# Altium PCB PDC_Rev_2.PcbDoc (part 2 of 3)
Units mil, origin at the board's own origin, x right, y up, seen from the top; angles counter-clockwise.
Board outline 5005 x 4200 mil, 4 copper layers (Top Layer, Signal_1, Signal_2, Bottom Layer), stack 23.756 mil thick; 184 components, 175 nets, 851 pads, 1149 vias.
Unrouted connection lines stored in the file: 187.
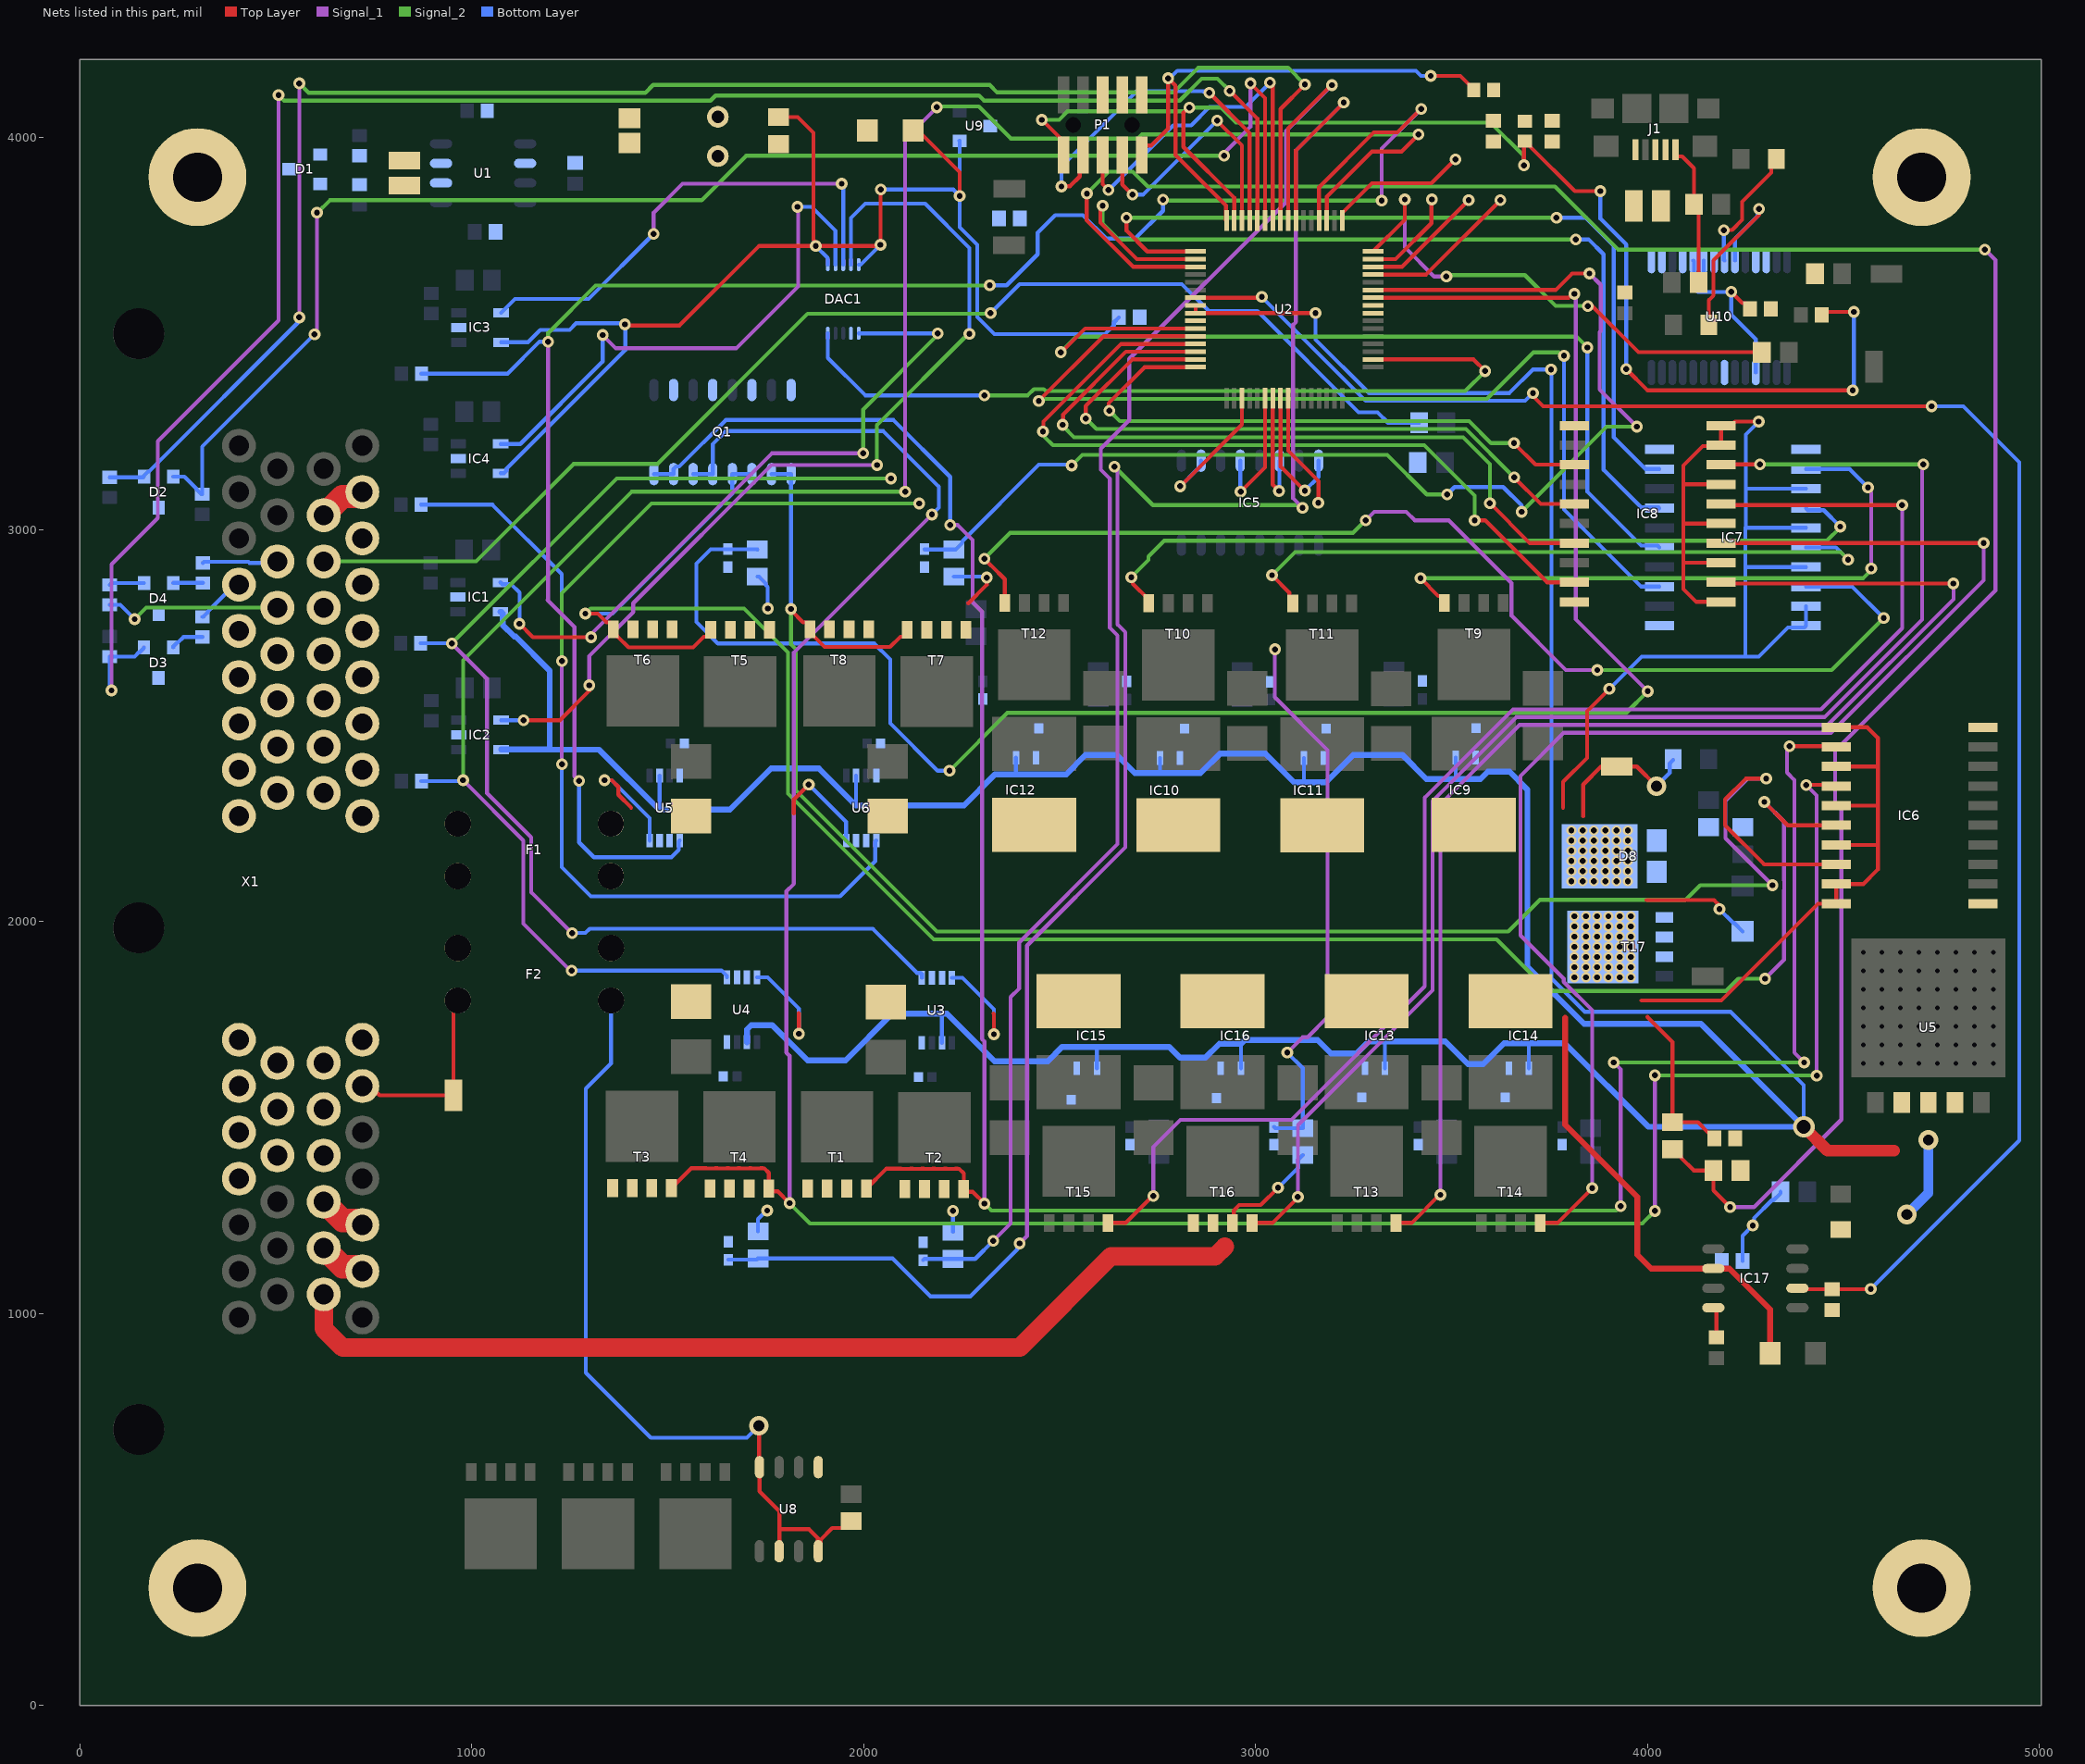
[diagram p4: the nets of this part, all layers, seen from the top]

## Part data
C1: library part 943, Dielectric=Ceramic, Manufacturer_id=1, Package="CAP 0603/1608", Voltage_Rating=50V, Created_By="Nick Mah", Created_Date=10/20/2018, Drawer_id=1, idCapacitor=943, Name="Cap_0.10uf_50V_CAP 0603/1608"
C2: library part 929, Dielectric=Ceramic, Manufacturer_id=1, Package="CAP 0603/1608", Voltage_Rating=50V, Created_By="Nick Mah", Created_Date=10/20/2018, Drawer_id=1, idCapacitor=929, Name="Cap_4700pf_50V_CAP 0603/1608"
C3: library part 223, Dielectric=Ceramic, Manufacturer_id=1, Package="CAP 0603/1608", Voltage_Rating=16V, Created_By="Nick Mah", Created_Date=10/20/2018, Drawer_id=1, idCapacitor=223, Name="Cap_0.10uf_16V_CAP 0603/1608"
C4 C6 C24 C25 C26: library part 583, Dielectric=Ceramic, Manufacturer_id=1, Package="CAP 0603/1608", Voltage_Rating=25V, Created_By="Nick Mah", Created_Date=10/20/2018, Drawer_id=1, idCapacitor=583, Name="Cap_0.10uf_25V_CAP 0603/1608"
C5: library part 529, Dielectric=Ceramic, Manufacturer_id=1, Package="CAP 0603/1608", Voltage_Rating=25V, Created_By="Nick Mah", Created_Date=10/20/2018, Drawer_id=1, idCapacitor=529, Name="Cap_100pf_25V_CAP 0603/1608"
C7 C8 C9 C10 C11 C12 C13 C14 C15 C16 C17 C18: library part 57, Dielectric=Ceramic, Manufacturer_id=1, Package="CAP 0402/1005", Voltage_Rating=16V, Created_By="Nick Mah", Created_Date=10/20/2018, Drawer_id=1, idCapacitor=57, Name="Cap_220pf_16V_CAP 0402/1005"
C19 C20: library part 235, Dielectric=Ceramic, Manufacturer_id=1, Package="CAP 0603/1608", Voltage_Rating=16V, Created_By="Nick Mah", Created_Date=10/20/2018, Drawer_id=1, idCapacitor=235, Name="Cap_10uf_16V_CAP 0603/1608"
C21 C22: library part 231, Dielectric=Ceramic, Manufacturer_id=1, Package="CAP 0603/1608", Voltage_Rating=16V, Created_By="Nick Mah", Created_Date=10/20/2018, Drawer_id=1, idCapacitor=231, Name="Cap_2.2uf_16V_CAP 0603/1608"
C23: library part 689, Dielectric=Ceramic, Manufacturer_id=1, Package="CAP 0805/2012", Voltage_Rating=25V, Created_By="Nick Mah", Created_Date=10/20/2018, Drawer_id=1, idCapacitor=689, Name="Cap_4700pf_25V_CAP 0805/2012"
D1: library part 7, "ESD Protection Diode", Manufacturer_id=1, Package=SOT-23, Power=350W, Supplier1PartNo=NUP1105LT1GOSCT-ND, ComponentLink1URL=https://www.digikey.com/product-detail/en/on-semiconductor/NUP1105LT1G/NUP1105LT1GOSCT-ND/2122067, Drawer_id=1, Ic=8A, idDiode=7, Link=https://www.digikey.com/product-detail/en/on-semiconductor/NUP1105LT1G/NUP1105LT1GOSCT-ND/2122067, MfrPartNo=NUP1105LT1G, Name=SOT-23_350W_Zener, Num_Circuits=1, Supplier1=Digikey, Type=Zener
D2 D3 D4: library part 14, "DIODE ZENER ARRAY 4.7V SOT23-3", Manufacturer_id=1, MfrPartNo=AZ23C4V7-7-F, Package=SOT23-3, Power=300mW, Created_By="Angel Delgado", Drawer_id=1, idDiode=14, Link=https://www.digikey.com/product-detail/en/diodes-incorporated/AZ23C4V7-7-F/AZ23C4V7-FDICT-ND/815309, Name=AZ23C4V7-7-F, Num_Circuits=2, Supplier1=Digi-Key, Type="Zener Array"
D5: library part 2, "Diode Super Barrier 40V 1A Surface Mount SOD-123F", Manufacturer_id=1, MfrPartNo=1N5819HW1-7-F, Package=SOD-123, Power=40V, Supplier1PartNo=1N5819HW1-7-FDITR-ND, ComponentLink1Description=Datasheet, ComponentLink1URL=https://www.diodes.com/assets/Datasheets/1N5819HW1.pdf, Drawer_id=1, Ic=1A, idDiode=2, Link=https://www.digikey.com/product-detail/en/diodes-incorporated/1N5819HW1-7-F/1N5819HW1-7-FDITR-ND/5768523, Name=1N5819, Num_Circuits=1, Supplier1=Digi-Key, Type="Super Barrier"
D6: library part 4, "100V Reverse DC Voltage", Manufacturer_id=1, MfrPartNo=1N4148W-7-F, Package=SOD123, Drawer_id=1, Ic="300 mA", idDiode=4, Link=https://www.digikey.com/product-detail/en/diodes-incorporated/1N4148W-7-F/1N4148W-FDICT-ND/815280, Name=1N4148W-7-F
D7: library part 10, "Zener Diode 14V 500mW ±5% Surface Mount SOD-123", Manufacturer_id=8, Package=SOD-123, Power=500mW, Supplier1PartNo=DDZ9701-7DICT-ND, ComponentLink1Description=Datasheet, ComponentLink1URL=https://www.diodes.com/assets/Datasheets/ds30410.pdf, Drawer_id=1, idDiode=10, Link=https://www.digikey.com/product-detail/en/diodes-incorporated/DDZ9701-7/DDZ9701-7DICT-ND/3877402, MfrPartNo=DDZ9701-7, Name=DDZ9701, Num_Circuits=1, Supplier1=Digi-Key, Type=Zener
D8: library part 11, Manufacturer_id=1, MfrPartNo=FSV20100V, Package=TO-277, Supplier1PartNo=FSV20100VCT-ND, ComponentLink1Description=Datasheet, ComponentLink1URL=https://www.fairchildsemi.com/datasheets/FS/FSV20100V.pdf, Drawer_id=1, idDiode=11, Link=https://www.digikey.com/product-detail/en/on-semiconductor/FSV20100V/FSV20100VCT-ND/5306682, Name=FSV20100V, Type=Schottky
D9 LED2: library part 2, Manufacturer_id=1, Package=0805, Brightness=7mcd, Drawer_id=1, Id=20mA, idLED=2, Link=https://www.digikey.com/product-detail/en/visual-communications-company-vcc/CMD17-21VGD-TR8/L62505CT-ND/254936, Name=CMD17_0805_GREEN, Vf=2.1V
D10: library part 1, Package=0805, Drawer_id=1, idLED=1, Manufacturer_id=1, Name=LED_0805_RED, Vf=0.7V
DAC1: library part 25, "10bit 4 channel DAC", Manufacturer_id=1, MfrPartNo=AD5314ARMZ, Package=MSOP-10, Drawer_id=1, idFuse=3, idIC_Misc=25, Link=https://www.digikey.com/product-detail/en/analog-devices-inc/AD5314ARMZ/AD5314ARMZ-ND/653841, Name=AD5314ARMZ, Num_Circuits=4, Type=DAC, Vin(Max)=5.5, Vin(Min)=2.5
F1 F2 U10: library part 3, Manufacturer_id=1, Drawer_id=1
  F1 F2: idFuse=3, Name="3568 Mini Fuse Holder"
  U10: Created_By=Kyle, idIC_Interface=3, Link=https://www.digikey.com/product-detail/en/ftdi-future-technology-devices-international-ltd/FT232RL-REEL/768-1007-1-ND/1836402, MfrPartNo=FT232RL, Name="USB FTDI", Protocol=UART, Vin(Max)=5.25, Vin(Min)=3.3
IC1 IC2 IC3 IC4: library part 4, Manufacturer_id=1, MfrPartNo=LT1716IS5#PBF, Drawer_id=1, idOp_Amp=4, Name="Op-Amp LT1716", Num_Circuits=1
IC5: library part 20, idIC_Misc=20
IC6 IC7 IC8: library part 16, Manufacturer_id=1, Created_By="Eunice Bernardo", Created_Date=10/27/2018, Drawer_id=1, idIC_Misc=16, Name="LT1161ISWPBF MOSFET Driver"
IC9 IC10 IC11 IC12 IC13 IC14 IC15 IC16 U3 U4 U5 U6: library part 13, Manufacturer_id=1, Package=MS8, Created_By=Eddy, Created_Date=10/17/2018, Drawer_id=1, idIC_Misc=13, Name="LT6100 Current Sense Amp"
IC17: library part 10, "IC VREF SERIES 5V 8SOIC", Manufacturer_id=1, MfrPartNo=MAX6350CSA+, Package=SOIC-8, Created_By="Albert Panuco", Drawer_id=1, idPMIC_Lin=10, Link=https://www.digikey.com/product-detail/en/maxim-integrated/MAX6350CSA/MAX6350CSA-ND/1867176, Name=MAX6350CSA+_5V_Ref, Num_Outputs=1, Output_Config=5V, Updated_By="Albert Panuco", Vin(Max)=40V, Vout(Max)=12V
J1: library part 5, "USB Micro Type B", Manufacturer_id=1, ComponentLink1Description=Datasheet, Created_By=Aiku, Created_Date=10/20/2018, Drawer_id=1, idConn=5, Link=https://www.mouser.com/ProductDetail/TE-Connectivity-AMP/1981568-1?qs=sGAEpiMZZMulM8LPOQ%252bykzEIUPbUCiSfqsfxH3Oq%252bYo%3d, MfrPartNo=1981568-1, Name="TE USB Micro", Num_Contacts=5, Supplier1=TE
LED1: library part 2, Manufacturer_id=1, Brightness=35mcd, Drawer_id=1, Id=20mA, idLED=2, Name=LED_0805_GREEN, Vf=2V
M1 M2 M3 T1 T2 T3 T4 T5 T6 T7 T8 T9 T10 T11 T12 T13 T14 T15 T16 T17: library part 3, "N-Channel 25V 100A (Tc) 106W (Tc) Surface Mount LFPAK56, Power-SO8", Manufacturer_id=6, MfrPartNo=PSMN2R2-25YLC,115, Package=LFPAK-SO8, Supplier1PartNo=1727-5299-1-ND, ComponentLink1Description=Datasheet, ComponentLink1URL=https://assets.nexperia.com/documents/data-sheet/PSMN2R2-25YLC.pdf, Created_By=Nick, Drawer_id=1, Id=100A, idFETs=3, Link=https://www.digikey.com/product-detail/en/nexperia-usa-inc/PSMN2R2-25YLC115/1727-5299-1-ND/2674299, Name=PSMN2R2, Num_Circuits=1, Rds_On=2.5mOhm, Supplier1=Digi-Key, Vdss=25V, Vgs(Max)=20V, Vgs(typ)=10V
OVP_G PWR_IN PWR_OUT TEST_CANN1 TEST_CANP1 TEST_CANRX1 TEST_CANTX1 TEST_USBD_N1 TEST_USBD_P1 UART_RX1 UART_TX1: library part 5, Manufacturer_id=1, Package=0603, ComponentLink1Description=Datasheet, ComponentLink1URL=https://www.te.com/commerce/DocumentDelivery/DDEController?Action=srchrtrv&DocNm=1773266&DocType=DS&DocLang=English, Drawer_id=1, idTable=5, Link=https://www.digikey.com/product-detail/en/te-connectivity-amp-connectors/RCU-0C/A106145CT-ND/3477802, MfrPartNo=RCU-0C, Name=RCU-0C_Test_Point
P1: library part 4, "2 row connector", Manufacturer_id=1, Voltage_Rating=None, ComponentLink1Description=Datasheet, Created_By=Aiku, Drawer_id=1, idConn=4, Link=https://www.digikey.com/product-detail/en/5103309-1/A33160-ND/1114898?utm_campaign=buynow&WT.z_cid=ref_octopart_dkc_buynow&utm_medium=aggregator&curr=usd&site=us&utm_source=octopart, MfrPartNo=5103309-1, Name=CONN_TE_2X5POS, Num_Contacts=10, Num_Rows=2, Pitch=2.54mm
"PTC Fuse1" "PTC Fuse2" "PTC Fuse3" "PTC Fuse4" "PTC Fuse5" "PTC Fuse6" "PTC Fuse7" "PTC Fuse8": library part 6, "Fuse", Manufacturer_id=1, MfrPartNo=2920L500/16MR, Created_By=Angel, Drawer_id=1, I_hold="5 A", I_max="40 A", I_trip="10 A", idFuse=6, LatestRevisionDate=17-Jul-2002, LatestRevisionNote="Re-released for DXP Platform.", Link=https://www.digikey.com/product-detail/en/littelfuse-inc/2920L500-16MR/F6136CT-ND/4147146, Name=2920L500/16MR, PackageDescription="Thru-Hole; 2 Leads", PackageReference=PIN-W2/E2.8, Published=8-Jun-2000, Publisher="Altium Limited", V_max="16 V"
Q1: library part 5, Manufacturer_id=1, Package=SOIC-16, Created_By="Angel Delgado", Drawer_id=1, hFE=75, Ic=200mA, idBJT=5, Link=https://www.mouser.com/ProductDetail/ON-Semiconductor-Fairchild/MMPQ3904?qs=sGAEpiMZZMshyDBzk1%2fWi8oN7VHZ91OkACYhS8H8agM%3d, MfrPartNo=MMPQ3904, Name=MMPQ3904, Num_Circuits=4, Type="NPN Array", Vce(Max)=40V
R1 R4 R7 R10 R23: library part 313, Manufacturer_id=1, Package=0603, Power=1/10W, Tolerance=1%, ComponentLink1Description=Datasheet, Created_By="Nick Mah", Created_Date=2018-10-20, Drawer_id=1, idResistor=313, Name=Res_10k_0603_1/10W_1%, Supplier 1=Digi-Key
R2 R5 R8 R11 R16: library part 529, Manufacturer_id=1, Package=0805, Power=1/10W, Tolerance=1%, ComponentLink1Description=Datasheet, Created_By="Nick Mah", Created_Date=2018-10-20, Drawer_id=1, idResistor=529, Name=Res_10k_0805_1/10W_1%, Supplier 1=Digi-Key
R3 R6 R9 R12: library part 300, Manufacturer_id=1, Package=0603, Power=1/10W, Tolerance=1%, ComponentLink1Description=Datasheet, Created_By="Nick Mah", Created_Date=2018-10-20, Drawer_id=1, idResistor=300, Name=Res_3.0k_0603_1/10W_1%, Supplier 1=Digi-Key
R13 R14: library part 1340, Manufacturer_id=1, Package=0603, Power=1/10W, Tolerance=5%, ComponentLink1Description=Datasheet, Created_By="Nick Mah", Created_Date=2018-10-20, Drawer_id=1, idResistor=1340, Name=Res_62_0603_1/10W_5%, Supplier 1=Digi-Key
R15: library part 2293, Manufacturer_id=1, Package=0603, Power=1/10W, Tolerance=10%, ComponentLink1Description=Datasheet, Created_By="Nick Mah", Created_Date=2018-10-20, Drawer_id=1, idResistor=2293, Name=Res_100_0603_1/10W_10%, Supplier 1=Digi-Key
R17 R18 R19 R20 R21 R22: library part 297, Manufacturer_id=1, Package=0603, Power=1/10W, Tolerance=1%, ComponentLink1Description=Datasheet, Created_By="Nick Mah", Created_Date=2018-10-20, Drawer_id=1, idResistor=297, Name=Res_2.2k_0603_1/10W_1%, Supplier 1=Digi-Key
R24: library part 1393, Manufacturer_id=1, Package=0603, Power=1/10W, Tolerance=5%, ComponentLink1Description=Datasheet, Created_By="Nick Mah", Created_Date=2018-10-20, Drawer_id=1, idResistor=1393, Name=Res_10k_0603_1/10W_5%, Supplier 1=Digi-Key
R25 R28 R31 R34: library part 2702, "Current Sense Resistor", Manufacturer_id=1, MfrPartNo=CSNL2010FT2L00, Package=2010, Power=1.5W, Supplier Part Number 1=Digi-Key, Tolerance=1%, ComponentLink1Description=Datasheet, Created_By=Angel, Drawer_id=1, idResistor=2702, Link=https://www.digikey.com/product-detail/en/stackpole-electronics-inc/CSNL2010FT2L00/CSNL2010FT2L00CT-ND/1788126, Name=Res_.002_2010_1.5W_1%, Supplier 1=Digi-Key
R26 R29 R32 R35 R38 R41 R44 R47 R50 R53 R56 R59: library part 2430, Manufacturer_id=1, Package=0805, Power=1/10W, Tolerance=10%, ComponentLink1Description=Datasheet, Created_By="Nick Mah", Created_Date=2018-10-20, Drawer_id=1, idResistor=2430, Name=Res_27k_0805_1/10W_10%, Supplier 1=Digi-Key
R27 R30 R33 R36 R39 R42 R45 R48 R51 R54 R57 R60: library part 97, Manufacturer_id=1, Package=0402, Power=1/10W, Tolerance=1%, ComponentLink1Description=Datasheet, Created_By="Nick Mah", Created_Date=2018-10-20, Drawer_id=1, idResistor=97, Name=Res_10k_0402_1/10W_1%, Supplier 1=Digi-Key
R37 R40 R43 R46 R49 R52 R55 R58: library part 2701, "Current Sense Resistor", Manufacturer_id=1, MfrPartNo=CSRN2010FK20L0, Package=2010, Power=1W, Supplier Part Number 1=Digi-Key, Tolerance=1%, ComponentLink1Description=Datasheet, Created_By=Angel, Drawer_id=1, idResistor=2701, Link=https://www.digikey.com/product-detail/en/stackpole-electronics-inc/CSRN2010FK20L0/CSRN2010FK20L0TR-ND/1646098, Name=Res_.02_2010_1W_1%, Supplier 1=Digi-Key
R61: library part 2432, Manufacturer_id=1, Package=0805, Power=1/10W, Tolerance=10%, ComponentLink1Description=Datasheet, Created_By="Nick Mah", Created_Date=2018-10-20, Drawer_id=1, idResistor=2432, Name=Res_39k_0805_1/10W_10%, Supplier 1=Digi-Key
R62: library part 2533, Manufacturer_id=1, Package=0805, Power=1/4W, Tolerance=10%, ComponentLink1Description=Datasheet, Created_By="Nick Mah", Created_Date=2018-10-20, Drawer_id=1, idResistor=2533, Name=Res_10k_0805_1/4W_10%, Supplier 1=Digi-Key
R63: library part 2413, Manufacturer_id=1, Package=0805, Power=1/10W, Tolerance=10%, ComponentLink1Description=Datasheet, Created_By="Nick Mah", Created_Date=2018-10-20, Drawer_id=1, idResistor=2413, Name=Res_1.0k_0805_1/10W_10%, Supplier 1=Digi-Key
R64: library part 2703, Manufacturer_id=1, Package=0805, Power=1/10W, Supplier Part Number 1=Digi-Key, Tolerance=0.5%, ComponentLink1Description=Datasheet, Drawer_id=1, idResistor=2703, Link=https://www.digikey.com/product-detail/en/susumu/RR1220P-1472-D-M/RR12P14.7KDCT-ND/1288245, Name=Res_14.7K_0805_1/10W_0.5%
R65: library part 553, Manufacturer_id=1, Package=0805, Power=1/10W, Tolerance=1%, ComponentLink1Description=Datasheet, Created_By="Nick Mah", Created_Date=2018-10-20, Drawer_id=1, idResistor=553, Name=Res_100k_0805_1/10W_1%, Supplier 1=Digi-Key
R66: library part 545, Manufacturer_id=1, Package=0805, Power=1/10W, Tolerance=1%, ComponentLink1Description=Datasheet, Created_By="Nick Mah", Created_Date=2018-10-20, Drawer_id=1, idResistor=545, Name=Res_47k_0805_1/10W_1%, Supplier 1=Digi-Key
R67: library part 497, Manufacturer_id=1, Package=0805, Power=1/10W, Tolerance=1%, ComponentLink1Description=Datasheet, Created_By="Nick Mah", Created_Date=2018-10-20, Drawer_id=1, idResistor=497, Name=Res_470_0805_1/10W_1%, Supplier 1=Digi-Key
R68 R69 R70 R71: library part 721, Manufacturer_id=1, Package=0805, Power=1/4W, Tolerance=1%, ComponentLink1Description=Datasheet, Created_By="Nick Mah", Created_Date=2018-10-20, Drawer_id=1, idResistor=721, Name=Res_1.0k_0805_1/4W_1%, Supplier 1=Digi-Key
R?: library part 985, Manufacturer_id=1, Package=0805, Power=1/2W, Tolerance=1%, ComponentLink1Description=Datasheet, Created_By="Nick Mah", Created_Date=2018-10-20, Drawer_id=1, idResistor=985, Name=Res_100k_0805_1/2W_1%, Supplier 1=Digi-Key
U1: library part 5, Manufacturer_id=1, MfrPartNo=MCP2561, Package=SOIC-8, Created_By="Angel Delgado", Data_Rate=1Mbps, Drawer_id=1, idIC_Interface=5, Link=https://www.digikey.com/product-detail/en/microchip-technology/MCP2561T-E-SN/MCP2561T-E-SNCT-ND/5148846, Name="CAN Transceiver", Num_Circuits=1, Protocol=CAN, Type=Transceiver, Vin(Max)=5.5V, Vin(Min)=4.5V
U2: library part 1, Drawer_id=1, idMCU=1, Manufacturer_id=1, Name="MKE18F512VLH16 MCU"
U5: library part 6, Current_Rating=2A, Dropout_Voltage=0.7V, Manufacturer_id=1, MfrPartNo=BA50DD0WHFP-TR, Drawer_id=1, idPMIC_Lin=6, Link=https://www.mouser.com/ProductDetail/ROHM-Semiconductor/BA50DD0WHFP-TR?qs=4kLU8WoGk0sFpKnESpdNFg%3D%3D, Name="BA50DD0WHFP-TR Linear Voltage Regulator 5", Vin(Max)=33V, Vin(Min)=3V, Vout(Max)=5V
U8: library part 18, "Protected High Side MOSFET Driver", Manufacturer_id=1, Drawer_id=1, idIC_Misc=18, Name="LT1910 MOSFET Driver"
U9: library part 23, Manufacturer_id=1, MfrPartNo=MCP9701T-E/TT, Package=SOT23-3, Drawer_id=1, idFuse=3, idIC_Misc=23, Link=https://www.digikey.com/product-detail/en/microchip-technology/MCP9701T-E-TT/MCP9701T-E-TTCT-ND/1987446, Name=MCP970x, Vin(Max)=5.5V, Vin(Min)=3.1V
W1: library part 18, "Jumper headers", Manufacturer_id=1, MfrPartNo=XG8T-0231, ComponentLink1Description=Datasheet, Drawer_id=1, idConn=18, idFuse=3, Link=https://www.digikey.ca/product-detail/en/omron-electronics-inc-emc-div/XG8T-0231/XG8T-0231-ND/1829453, Name=XG8T-0231, Num_Contacts=2, Num_Rows=1, Pitch=".1 mm", Supplier1=Digi-Key
X1: library part 3, "90 Degree", Manufacturer_id=1, ComponentLink1Description=Datasheet, Drawer_id=1, idConn=3, Link=https://www.te.com/usa-en/product-3-6437285-2.html, MfrPartNo=3-6437285-2, Name="AMP Superseal 60POS 90Deg", Num_Contacts=60, Num_Rows=4, Pitch="3 mm"

## Free pads (board coordinates)
  round 250 hole 125: 1(300,300) 1(300,3900) 1(4700,300) 1(4700,3900)

## Via types
v1: diameter 25, hole 15, Top Layer to Bottom Layer, 876 vias
v2: diameter 30, hole 15, Top Layer to Bottom Layer, 268 vias
v3: diameter 50, hole 28, Top Layer to Bottom Layer, 4 vias
v4: diameter 55, hole 35, Top Layer to Bottom Layer, 1 vias

## Nets (pads, with @x,y where several pads share a name; then routed paths per layer and width w, separated by ;. In a path a pad name is that pad's centre, name@x,y a point inside that pad or via, vN(x,y) a via of type N, cw(c..) or ccw(c..) an arc to the next point about the centre after c; other vN are vias at no path point)
5VREF: C6.2 C22.2 IC17.6 U2.7 | length 4753.4
  Top Layer w10: U2.7@2847.24,3592.17 3014.17,3592.17 v2(3016,3594) ; v2(3708,3349) 3708,3341 3734,3315 v2(4725,3315) ; IC17.6@4382.73,1064.91 4403.15,1064.91 4406.02,1062.03 C22.2@4471,1062.03 4569.03,1062.03 v2(4570,1063)
  Bottom Layer w10: v2(3016,3594) 3281,3329 3688,3329 v2(3708,3349) ; v2(4570,1063) 4949,1442 4949,3172 4806,3315 v2(4725,3315)
12V_IN: F1.2 F2.2 PWR_IN.1 X1.A8 X1.A9 X1.A17 X1.B1 X1.B2 X1.B8 X1.B9 | length 489
  Top Layer w10: X1.B2@720.87,1580.71 741.32,1580.71 765.03,1557 PWR_IN.1@953.1,1557 953.1,1772.14 964.72,1783.76 F2.2@964.72,1799.16
+5: C4.2 C19.2 D6.2 DAC1.1 DAC1.5 IC1.5 IC2.5 IC3.5 IC4.5 IC9.2 IC10.2 IC11.2 IC12.2 IC13.2 IC14.2 IC15.2 IC16.2 R16.2 R63.1 R65.2 U2.8 U2.9 U3.2 U4.2 U5.2 U5.4@4784.61,1538.86 U6.2 U9.1 | length 16005.7
  Top Layer w10: v2(1390.8,3524) 1393.8,3521 1530,3521 1733,3724 v2(1878,3724) ; R65.2@1783,4052.9 1832.1,4052.9 1872,4013 1872,3739.86 1874.17,3737.68 1874.17,3727.83 v2(1878,3724) ; v2(2044,3868) 2043,3867 v2(2043,3727) 2040,3724 v2(1878,3724) ; D6.2@2126.07,4018.45 2132.62,4025 2245,3912.62 v2(2245,3852) ; U2.8@2847.24,3572.48 U2.9@2847.24,3552.8 v2(3153,3552.8)
  Top Layer w30: v4(4399,1476.64) 4459.64,1416 4629.5,1416
  Bottom Layer w10: IC4.5@1074,3144.2 1081.87,3144.2 1088.69,3151.01 1088.69,3155.4 1391.8,3458.52 1391.8,3525 1393,3525 1391,3527 1266.57,3527 1249.57,3510 1174.72,3510 1143.31,3478.6 IC3.5@1075.13,3478.6 ; 1478,2286 1479.41,2287.41 U5.2@1479.41,2372.89 ; v2(1878,3724) 1908.63,3693.37 DAC1.1@1908.63,3676.6 ; 1980,2297 1980.85,2297.85 U6.2@1980.85,2372.89 ; DAC1.5@1987.68,3676.6 1992.6,3676.6 v2(2043,3727) ; v2(2044,3868) 2229,3868 v2(2245,3852) ; 2199,1765 2199.8,1764.2 U3.2@2199.8,1691.11 ; U9.1@2244.63,3992.6 2245,3992.23 v2(2245,3852) ; 2388,2376 2388.78,2376.78 IC12.2@2388.78,2418.36 ; IC15.2@2595.29,1626.11 2595.29,1680 ; C4.2@2651.43,3542 2638.71,3529.28 2638.71,3521.71 2616,3499 2333.9,3499 2290,3542.9 2290,3727.28 2245,3772.28 v2(2245,3852) ; IC10.2@2756.2,2417.89 2756.2,2379.8 2757,2379 ; IC16.2@2962.71,1626.11 2962.71,1688.71 2963,1689 ; IC11.2@3123.63,2417.79 3123.63,2356.37 3124,2356 ; v2(3153,3552.8) 3153,3485.28 3289.28,3349 3648,3349 3708,3409 v2(3754,3409) 3755,3408 3755,1855 3840,1770 4212,1770 4399,1583 v4@4399,1482.22 ; IC13.2@3330.13,1626.11 3330.13,1693.13 3331,1694 ; 3510,2364 3510.59,2364.59 IC9.2@3510.59,2419 ; IC14.2@3697.55,1626.11 3697.55,1689.55 3698,1690 ; C19.2@4242.57,1134.36 4242.57,1198.57 v2(4269,1225) 4272.49,1228.49 4272.49,1243.94 4317.98,1289.43 4321.91,1289.43 4339.55,1307.06 R63.1@4339.55,1311
  Bottom Layer w15: IC1.5@1073.27,2791 1075.04,2791 1079.35,2786.69 1079.35,2756.69 1108.54,2727.5 1112.07,2727.5 1199,2640.57 1199,2440 1198,2439 ; IC2.5@1075.13,2439.2 1197.8,2439.2 1198,2439 ; U4.2@1702.32,1692.41 1702.32,1725.32 1713,1736 1767,1736 1857,1646 1953.88,1646 2072.88,1765 2199,1765 2213,1765 2334,1644 2470,1644 2506,1680 2595.29,1680 2780,1680 2807,1653 2872,1653 2908,1689 2963,1689 2972.5,1698.5 3158.31,1698.5 3192.81,1664 3258,1664 3288,1694 3331,1694 3331.5,1694.5 3484.5,1694.5 3542,1637 3581,1637 3634,1690 3698,1690 3789,1690 4002.36,1476.64 v4@4393.78,1476.64 ; v4@4393.78,1482.22 4136.5,1739.5 3838.5,1739.5 3694,1884 3694,2337 3648,2383 3593,2383 3574,2364 3510,2364 3436,2364 3375,2425 3249,2425 3180,2356 3124,2356 3098,2356 3025,2429 2910,2429 2860,2379 2757,2379 2692,2379 2646,2425 2566,2425 2517,2376 2388,2376 2335,2376 2256,2297 1980,2297 1886,2391 1764,2391 1659,2286 1478,2286 1325,2439 1198,2439 ; v4(4399,1476.64) 4404.58,1482.22 v4@4399,1482.22
+12: "PTC Fuse1.2" "PTC Fuse2.2" "PTC Fuse3.2" "PTC Fuse4.2" "PTC Fuse5.2" "PTC Fuse6.2" "PTC Fuse7.2" "PTC Fuse8.2" C21.2 D5.1 D7.2 D8.3 F1.1 F2.1 IC6.11 IC6.13 IC6.15 IC6.17 IC6.19 IC6.20 IC7.11 IC7.13 IC7.15 IC7.17 IC7.19 IC7.20 IC8.11 IC8.13 IC8.15 IC8.17 IC8.19 IC8.20 IC17.2 LED2.1 PWR_OUT.1 R25.2 R28.2 R31.2 R34.2 R61.2 R64.1 T17.mb U3.8 U4.8 U5.8 U6.8 U8.4 U8.6 U8.8 | length 10075
  Top Layer w10: v2(1339,2361) 1357,2361 1374.21,2343.79 1374.21,2323.79 1407,2291 ; v3(1733,714) 1733,609.63 U8.4@1734.34,608.28 1734.34,546.66 1785,496 1785,450 ; U8.6@1784.34,393.72 1785,394.37 1785,450 ; 1822,2276 1822,2312 v2(1860,2350) ; 1834,1767 1835,1766 v2(1835,1714) ; R64.1@1968.34,470.55 1964.41,470.55 1946.77,452.91 1919.91,452.91 1890.64,423.64 1890.64,407.46 1884.34,401.17 U8.8@1884.34,393.72 1883.25,394.81 1883.25,427.27 1860.52,450 1785,450 ; 2331.48,1765.7 2332.48,1764.7 v2(2332.48,1712.7) ; 3785,2291 3785,2357 3846,2418 3846,2537 v2(3903,2594) ; 3836,2269 3836,2350 3882,2396 PWR_OUT.1@3922,2396 3973,2396 v3(4023,2346) ; 3985,1799.16 4188.38,1799.16 4435.22,2046 IC6.20@4481.99,2046 IC6.19@4481.99,2096 4551,2096 4588,2133 4588,2196 ; 3998,2055 4170,2055 4184.36,2040.64 4184.36,2032.36 v2(4184,2032) ; 4000,1757 4064,1693 R61.2@4064,1488.45 4128.98,1488.45 4155.74,1461.69 4157.71,1461.69 4170.43,1448.97 C21.2@4170.43,1447 ; IC8.11@4188.01,2816 4124.53,2816 4092,2848.53 4092,2916 ; IC8.13@4188.01,2916 4092,2916 ; IC8.15@4188.01,3016 4093,3016 4092,3017 ; IC8.17@4188.01,3116 4092,3116 ; v2(4284,3276) 4223.6,3276 4213.6,3266 IC8.20@4188.01,3266 IC8.19@4188.01,3216 4185.47,3213.46 4141.46,3213.46 4092,3164 4092,3116 ; IC6.17@4481.99,2196 4588,2196 ; IC6.15@4481.99,2296 4586,2296 4588,2298 ; IC6.13@4481.99,2396 4588,2396 ; IC6.11@4481.99,2496 4561,2496 4588,2469 4588,2396 ; 4092,2916 4092,3017 ; 4092,3017 4092,3116 ; 4588,2196 4588,2298 ; 4588,2298 4588,2396
  Top Layer w15: 3790,1755 3790,1482 3974,1298 3974,1150.47 4009.56,1114.91 IC17.2@4168.17,1114.91 4209.09,1114.91 4312.93,1011.07 D5.1@4312.93,898.6
  Bottom Layer w10: v2(1339,2361) 1357,2361 1453.82,2264.18 U5.8@1453.82,2207.11 ; F2.1@1355.28,1799.16 1355.28,1638.28 1291,1574 1291,849 1457,683 1702,683 v3(1733,714) ; U4.8@1727.91,1858.19 1754.81,1858.19 1835,1778 v2(1835,1714) ; v2(1860,2350) 1955.26,2254.74 U6.8@1955.26,2207.11 ; U3.8@2225.39,1856.89 2252.28,1856.89 2332.48,1776.7 v2(2332.48,1712.7) ; v2(3903,2594) 3985.41,2676.41 4250,2676.41 ; v3(4023,2346) 4056.96,2379.96 4056.96,2403.71 LED2.1@4065.91,2412.65 ; v2(4184,2032) 4219.16,1996.84 4221.61,1996.84 D7.2@4243.18,1975.26 ; 4250,3006 4250,2906 ; 4251,3108 4251,3243 v2(4284,3276) ; IC7.19@4404.58,2805 IC7.20@4404.58,2755 4400.36,2750.78 4358.37,2750.78 4284,2676.41 4250,2676.41 ; IC7.17@4404.58,2905 4251,2905 4250,2906 ; IC7.15@4404.58,3005 4251,3005 4251,3105 IC7.13@4404.58,3105 ; 4250,2676.41 4250,2906
  other v1: 3814,1858 3842.8,1858 3871.6,1858 3900.4,1858 3929.2,1858 3958,1858 3814,1884 3842.8,1884 3871.6,1884 3900.4,1884 3929.2,1884 3958,1884 3814,1910 3842.8,1910 3871.6,1910 3900.4,1910 3929.2,1910 3958,1910 3814,1936 3842.8,1936 3871.6,1936 3900.4,1936 3929.2,1936 3958,1936 3814,1962 3842.8,1962 3871.6,1962 3900.4,1962 3929.2,1962 3958,1962 3814,1988 3842.8,1988 3871.6,1988 3900.4,1988 3929.2,1988 3958,1988 3814,2014 3842.8,2014 3871.6,2014 3900.4,2014 3929.2,2014 3958,2014 3806,2103 3834.8,2103 3863.6,2103 3892.4,2103 3921.2,2103 3950,2103 3806,2129 3834.8,2129 3863.6,2129 3892.4,2129 3921.2,2129 3950,2129 3806,2155 3834.8,2155 3863.6,2155 3892.4,2155 3921.2,2155 3950,2155 3806,2181 3834.8,2181 3863.6,2181 3892.4,2181 3921.2,2181 3950,2181 3806,2207 3834.8,2207 3863.6,2207 3892.4,2207 3921.2,2207 3950,2207 3806,2233 3834.8,2233 3863.6,2233 3892.4,2233 3921.2,2233 3950,2233
BAT_SENSE: R61.1 R62.2 U2.3 | length 5816.6
  Top Layer w10: v2(2569.7,3858) 2569,3857.3 2569,3790 2688.09,3670.91 U2.3@2847.24,3670.91 ; R61.1@4064,1419.55 4067.94,1419.55 4085.57,1401.91 4085.57,1397.98 4118.19,1365.36 R62.2@4168.55,1365.36 4168.55,1314.45 v2(4211,1272)
  Signal_1 w10: v2(4211,1272) 4272,1272 4495,1495 4495,2287.28 4479,2303.28 4479,2436 4888,2845 4888,3688 v2(4861,3715)
  Signal_2 w10: v2(2569.7,3858) 2625.7,3914 2687,3914 2725,3876 3764,3876 3925,3715 v2(4861,3715)
CAN_N: D1.2 R13.1 TEST_CANN1.1 U1.6 X1.A31
CAN_P: D1.1 R14.2 TEST_CANP1.1 U1.7 X1.A30
CS: DAC1.10 U2.34 | length 2108
  Top Layer w10: U2.34@3300,3434.69 3556.31,3434.69 v2(3586,3405)
  Signal_2 w10: v2(2308,3343) 2418.57,3343 2434.57,3359 2459.43,3359 2464.43,3354 3535,3354 v2(3586,3405)
  Bottom Layer w10: DAC1.10@1908.63,3501.4 1908.63,3438.37 2004,3343 v2(2308,3343)
D_IN_1: R18.2 X1.A29 | length 128.3
  Bottom Layer w10: R18.2@313,2777.59 314.97,2777.59 326.7,2789.32 326.7,2791.29 395.65,2860.24 X1.A29@405.91,2860.24
D_IN_2: R20.2 X1.A21 | length 455.5
  Signal_2 w10: v2(140,2772) 169.18,2801.18 X1.A21@504.33,2801.18
  Bottom Layer w10: R20.2@76,2808.41 103.59,2808.41 v2(140,2772)
D_IN_3: R17.2 X1.A20 | length 194.3
  Bottom Layer w10: R17.2@314,2915.59 316.95,2918.54 430.06,2918.54 433.01,2915.59 500.63,2915.59 X1.A20@504.33,2919.29
D_N: J1.2 TEST_USBD_N1.1 U10.16
D_OUT_1: D2.1 R22.1 U2.57 | length 4265.8
  Top Layer w10: U2.57@3063.78,3789.02 3063.78,4073.78 v2(3126,4136)
  Signal_1 w10: v2(560,3542) v2(560,4139)
  Signal_2 w10: v2(560,4139) 584,4115 1443,4115 1463,4135 2322,4135 2341,4116 2791,4116 2854,4179 3083,4179 v2(3126,4136)
  Bottom Layer w10: R22.1@76,3134 161.99,3134 D2.1@163.77,3135.78 163.77,3137.75 174.51,3148.5 176.48,3148.5 556.17,3528.19 556.17,3538.17 v2(560,3542)
D_OUT_2: D2.2 R19.1 U2.59 | length 3887.5
  Top Layer w10: v2(2987,4139) 3024.41,4101.59 U2.59@3024.41,3789.02
  Signal_1 w10: v2(599,3499) 599,3504.41 605,3510.41 v2(605,3809) ; v2(2920,3954.41) 2920,3961 2987,4028 v2(2987,4139)
  Signal_2 w10: v2(605,3809) 605,3808 637.91,3840.91 1586.91,3840.91 1700.41,3954.41 v2(2920,3954.41)
  Bottom Layer w10: D2.2@238.57,3135.78 266.81,3135.78 298.3,3104.29 298.3,3102.32 310.03,3090.59 R19.1@312,3090.59 312,3212 v2(599,3499)
D_OUT_3: D3.1 R21.1 U2.60 | length 4722.6
  Top Layer w10: v2(2934,4120) 3004.72,4049.28 U2.60@3004.72,3789.02
  Signal_1 w10: v2(81,2590) 81,2912 199,3030 199,3226 507,3534 507,4108.86 v2(507.14,4109)
  Signal_2 w10: v2(507.14,4109) 521.14,4095 1609.36,4095 1622.36,4108 2294.28,4108 2307.28,4095 2806.57,4095 2862.57,4151 2903,4151 v2(2934,4120)
  Bottom Layer w10: v2(81,2590) 75.83,2595.17 R21.1@75.83,2676.41 139.82,2676.41 150.88,2687.47 152.85,2687.47 163.6,2698.22 D3.1@163.6,2700.19
D_OUT_4: D3.2 R18.1 | length 86.6
  Bottom Layer w10: D3.2@238.4,2700.19 238.4,2702.16 249.15,2712.9 251.12,2712.9 264.62,2726.41 R18.1@313,2726.41
D_OUT_5: D4.1 R20.1 | length 89.5
  Bottom Layer w10: R20.1@76,2859.59 80.15,2863.74 D4.1@163.77,2863.74
D_OUT_6: D4.2 R17.1 | length 75.7
  Bottom Layer w10: D4.2@238.57,2863.74 239.24,2864.41 R17.1@314,2864.41
D_P: J1.3 TEST_USBD_P1.1 U10.15
DGND: C1.1 C2.1 C3.1 C4.1 C5.1 C6.1 C7.1 C8.1 C9.1 C10.1 C11.1 C12.1 C13.1 C14.1 C15.1 C16.1 C17.1 C18.1 C19.1 C20.1 C21.1 C22.1 C23.1 C25.1 C26.1 D1.3 D2.3 D3.3 D4.3 D8.1 D8.2 DAC1.7 IC1.2 IC2.2 IC3.2 IC4.2 IC6.1 IC6.10 IC7.1 IC7.10 IC8.1 IC8.10 IC9.4 IC9.7 IC10.4 IC10.7 IC11.4 IC11.7 IC12.4 IC12.7 IC13.4 IC13.7 IC14.4 IC14.7 IC15.4 IC15.7 IC16.4 IC16.7 IC17.4 J1.5 LED1.2 P1.3 P1.5 pad.1 Q1.10 Q1.12 Q1.14 Q1.16 R15.1 R27.1 R30.1 R33.1 R36.1 R39.1 R42.1 R45.1 R48.1 R51.1 R54.1 R57.1 R60.1 R62.1 R66.1 R67.1 T17.1 T17.2 T17.3 U1.2 U2.10 U2.40 U3.4 U3.6 U3.7 U4.4 U4.6 U4.7 U5.3@4716.89,1538.86 U5.4@1530.59,2372.89 U5.6@1505,2207.11 U5.7 U6.4 U6.6 U6.7 U8.1 U9.3 U10.7 U10.18 U10.21 U10.25 U10.26 W1.1 X1.A5 X1.A6 X1.A7 X1.A13 X1.A14 X1.A15 X1.A16 X1.A22 X1.A23 X1.A24 X1.A25 X1.A32 X1.A33 X1.A34 X1.B10 X1.B14 X1.B15 X1.B16 X1.B20 X1.B21 X1.B22 X1.B23 | length 292.6
  Top Layer w10: IC17.4@4168.17,1014.91 4169.71,1014.91 4176,1008.62 C20.1@4176,939.15
  Bottom Layer w25: v3(4662,1253) 4716.89,1307.89 v3(4716.89,1443)
DVCC: C3.2 C5.2 C25.2 P1.1 R23.2 R24.2 U2.41 U10.4 U10.19 U10.20 | length 548.5
  Top Layer w10: v2(4214,3607) 4242.31,3578.69 4249.13,3578.69 4261.85,3565.97 C25.2@4261.85,3564
  Bottom Layer w10: U10.19@4116.89,3686.72 4118.74,3684.86 4118.74,3655.38 4120,3654.12 4120,3616 4129,3607 4142,3607 ; U10.20@4143.5,3686.72 4143.5,3608.5 4142,3607 ; U10.4@4276.57,3401.28 4276.57,3486.43 4214,3549 v2(4214,3607) 4142,3607
DVCC_5V: J1.1 R70.2 R71.2 | length 371.9
  Top Layer w10: J1.1@4071.85,3969.69 4071.85,3955.54 4074.72,3952.67 4088.87,3952.67 4118.98,3922.56 R71.2@4118.98,3830 4130.87,3818.1 R70.2@4130.87,3630.47
EMERGENCY_SHUTDOWN: R?.2 X1.A12 | length 3234.9
  Signal_2 w10: X1.A12@622.44,2919.29 1011.29,2919.29 1260,3168 1474,3168 1857,3551 2322,3551 v2(2324,3553)
  Bottom Layer w10: v2(2324,3553) 2398,3627 2812,3627 2881,3558 3005,3558 3263,3300 3311,3300 3338,3273 R?.2@3417.55,3273
FTDI_GREEN: D9.2 U10.23 | length 507
  Top Layer w10: D9.2@4156.7,3523 4156.7,3585.87 4168.51,3597.68 4168.51,3687.51 4285,3804 v2(4285,3819)
  Bottom Layer w10: U10.23@4223.35,3686.72 4223.35,3742.35 4281.29,3800.29 4281.29,3815.29 v2(4285,3819)
FTDI_RED: D10.2 U10.22 | length 327.3
  Top Layer w10: v2(4195,3764) 4196.21,3765.21 4216.21,3765.21 4242,3791 4242,3837 4316.27,3911.27 4316.27,3933.04 D10.2@4329.22,3946
  Bottom Layer w10: v2(4195,3764) 4195,3688.45 U10.22@4196.73,3686.72
FTDI_RX: R69.2 U2.47 | length 248.3
  Top Layer w10: U2.47@3300,3690.59 3357.59,3690.59 3449,3782 3449,3842 v2(3450,3843)
FTDI_TX: R68.2 U2.48 | length 1320.8
  Top Layer w10: U2.48@3300,3710.28 3381,3791.28 v2(3381,3843) ; v2(3848,3571) 3847,3571 3845,3573 3857,3573 3977,3453 R68.2@4291.73,3453
  Signal_1 w10: v2(3381,3843) 3381,3721 3456,3646 v2(3487,3646)
  Signal_2 w10: v2(3487,3646) 3490.79,3649.79 3687.21,3649.79 3766,3571 v2(3848,3571)
HC1_ANALOG_BACKUP_REF: DAC1.2 IC4.4 | length 1406.1
  Signal_1 w10: v2(1334,3497) 1368,3463 1675,3463 1833,3621 1833,3822 v2(1831,3824)
  Bottom Layer w10: IC4.4@1074,3219 1124,3219 1334,3429 v2(1334,3497) ; v2(1831,3824) 1867,3824 1928.31,3762.69 DAC1.2@1928.31,3676.6
HC1_EN: IC5.16 U2.24 | length 354.8
  Top Layer w10: U2.24@3063.78,3336.26 3063.78,3161.22 3126,3099 v2(3126,3100)
  Bottom Layer w10: v2(3126,3100) 3161,3135 IC5.16@3161,3176.28
HC1_GATE: IC6.18 Q1.1 Q1.2 T7.4 T8.4 | length 4835.1
  Top Layer w10: v2(1815,2798) 1815,2794.26 1845.32,2763.94 1854.18,2763.94 1862.96,2755.16 T8.4@1862.96,2746.3 1862.96,2737.44 1871.74,2728.66 1872.97,2728.66 1900.63,2701 2067.36,2701 2093.72,2727.36 2102.58,2727.36 2111.36,2736.14 T7.4@2111.36,2745 ; v2(4303,2365) 4251,2365 4198,2312 4198,2246 4298,2146 IC6.18@4481.99,2146
  Signal_1 w10: v2(4303,2365) 4256,2365 4199,2308 4199,2213 v2(4319,2093)
  Signal_2 w10: v2(1815,2798) 1815,2707.28 1827,2695.28 1827,2335.28 2187.28,1975 3645,1975 3726,2056 4098,2056 4135,2093 v2(4319,2093)
  Bottom Layer w10: Q1.2@1765,3142.07 Q1.1@1815,3142.07 v2(1815,2798)
HC1_ISENSE_ADC: R12.1 U2.46 U6.5 | length 3596
  Top Layer w10: U2.46@3300,3670.91 3373.91,3670.91 v2(3544,3841)
  Signal_1 w10: v2(1230,2402) v2(1230,2665)
  Signal_2 w10: v2(1230,2665) 1230,2838 1459,3067 v2(2142,3067)
  Bottom Layer w10: R12.1@870.46,3064 1053,3064 1230,2887 v2(1230,2665) ; v2(1230,2402) 1230,2139 1304,2065 1940,2065 2029.7,2154.7 2029.7,2204.78 U6.5@2032.03,2207.11
HC1_VSENSE_ADC: R35.1 R36.2 U2.43 | length 3110.3
  Top Layer w10: U2.43@3300,3611.85 3765.85,3611.85 3808,3654 v2(3852,3654)
  Signal_1 w10: v2(3852,3654) 3881,3625 3881,3507.57 3878,3504.57 3878,3358 v2(3973,3263)
  Signal_2 w10: v2(2531,3164) 2558,3191 3336,3191 3437,3090 v2(3489,3090) ; v2(3679,3046) 3896,3263 v2(3973,3263)
  Bottom Layer w10: R36.2@2155.15,2950.28 2155.97,2949.45 R35.1@2230.5,2949.45 2234.44,2949.45 2252.08,2967.09 2252.08,2971.02 2447.05,3166 2529,3166 v2(2531,3164) ; v2(3489,3090) 3508,3109 3632,3109 3679,3062 v2(3679,3046)
HC2_ANALOG_BACKUP_REF: DAC1.3 IC3.4 | length 1245.1
  Signal_1 w10: v2(1464,3755) 1464,3809 1538,3883 v2(1944,3883)
  Bottom Layer w10: IC3.4@1075.13,3553.4 1110.73,3589 1298,3589 v2(1464,3755) ; v2(1944,3883) 1948,3879 DAC1.3@1948,3676.6
HC2_EN: IC5.14 U2.23 | length 321.5
  Top Layer w10: U2.23@3044.09,3336.26 3044.09,3114.91 v2(3060,3099)
  Bottom Layer w10: v2(3060,3099) 3061,3100 IC5.14@3061,3176.28
HC2_GATE: IC6.16 Q1.3 Q1.4 T5.4 T6.4 | length 5335.6
  Top Layer w10: v2(1290,2786) 1321.82,2786 1343.89,2763.94 1352.74,2763.94 1361.52,2755.16 T6.4@1361.52,2746.3 1361.52,2737.44 1370.3,2728.66 1371.53,2728.66 1400.19,2700 1564.92,2700 1592.28,2727.36 1601.14,2727.36 1609.92,2736.14 T5.4@1609.92,2745 ; v2(4298.5,2305.5) 4358,2246 IC6.16@4481.99,2246
  Signal_1 w10: v2(4298.5,2305.5) 4348.5,2255.5 4348.5,2105.93 4349,2105.43 4349,2080.57 4348.5,2080.07 4348.5,1903 v2(4300,1854.5)
  Signal_2 w10: v2(1290,2786) 1303.25,2799.25 1694.75,2799.25 1807,2687 1807,2327 2179,1955 3615.18,1955 3747.09,1823.09 4200.19,1823.09 4231.59,1854.5 v2(4300,1854.5)
  Bottom Layer w10: v2(1290,2786) 1359,2786 1665,3092 Q1.4@1665,3142.07 Q1.3@1715,3142.07
HC2_ISENSE_ADC: R9.1 U2.52 U5.5@1530.59,2207.11 | length 5070.4
  Top Layer w10: U2.52@3162.2,3789.02 3162.2,3874.2 3302,4014 3362,4014 3422,4074 v2(3423,4074)
  Signal_1 w10: v2(1195,3480) 1195,2823 1193,2821 1262,2752 1262,2371 v2(1274,2359) ; v2(3322,3840) 3322,3973 v2(3423,4074)
  Signal_2 w10: v2(1195,3480) 1195,3502 1316,3623 v2@2323,3623 ; v2(2322,3624) v2@2323,3623 ; v2@2325,3623 v2@2323,3623 ; v2(2764,3842) 2764,3840 v2(3322,3840)
  Bottom Layer w10: R9.1@871.59,3398.4 1091.4,3398.4 1173,3480 v2(1195,3480) ; v2(1274,2359) 1274,2202.28 1311.68,2164.61 1509.48,2164.61 1528.27,2183.39 1528.27,2204.78 U5.5@1530.59,2207.11 ; v2(2322,3624) 2365,3624 2444,3703 2444,3758 2489,3803 2559,3803 2619,3743 2693,3743 2764,3814 v2(2764,3842)
HC2_VSENSE_ADC: R32.1 R33.2 U2.42 | length 4694.5
  Top Layer w10: U2.42@3300,3592.17 3798.75,3592.17 3808.59,3602 v2(3814,3602)
  Signal_1 w10: v2(3814,3602) 3817,3599 3817,2772 v2(4001,2588)
  Signal_2 w10: v2(2219,2385) 2367,2533 3946,2533 v2(4001,2588)
  Bottom Layer w10: R32.1@1729.07,2949.45 1728.24,2950.28 R33.2@1653.71,2950.28 1609.94,2950.28 1573,2913.34 1573,2765 1628,2710 2027,2710 2068,2669 2068,2506 2189,2385 v2(2219,2385)
HC3_ANALOG_BACKUP_REF: DAC1.4 IC2.4 | length 2430.7
  Top Layer w10: v2(1132,2514) 1225,2514 1299.75,2588.75 v2(1299.75,2603)
  Signal_1 w10: v2(1299.75,2603) 1299.75,2677.75 1412,2790 1412,2812.72 1764.28,3165 v2(2034,3165)
  Signal_2 w10: v2(2034,3165) 2034,3267 2267,3500 v2(2270,3500)
  Bottom Layer w10: IC2.4@1075.13,2514 v2(1132,2514) ; DAC1.4@1967.68,3676.6 1967.68,3795.69 2004,3832 2157,3832 2270,3719 v2(2270,3500)
HC3_EN: IC5.12 U2.22 | length 344.8
  Top Layer w10: v2(2962,3097) 3024.41,3159.41 U2.22@3024.41,3336.26
  Bottom Layer w10: IC5.12@2961,3176.28 2961,3098 v2(2962,3097)
HC3_GATE: IC6.14 Q1.5 Q1.6 T3.4 T4.4 | length 6986.5
  Top Layer w10: T3.4@1509.6,1320.3 1560.23,1370.93 1598.18,1370.93 1598.61,1370.5 1621.39,1370.5 1621.82,1370.93 1626.98,1370.93 1627.41,1370.5 1650.19,1370.5 1650.62,1370.93 1655.78,1370.93 1656.21,1370.5 1678.99,1370.5 1679.42,1370.93 1684.58,1370.93 1685.01,1370.5 1707.79,1370.5 1708.22,1370.93 1713.38,1370.93 1713.81,1370.5 1736.59,1370.5 1737.02,1370.93 1742.18,1370.93 1742.61,1370.5 1746.74,1370.5 1758,1359.24 T4.4@1758,1319 1764.92,1312.08 1780.92,1312.08 v2(1811,1282) ; v2(4405,2349) 4478.99,2349 IC6.14@4481.99,2346
  Signal_1 w10: v2(1811,1282) 1811,1658 1803,1666 1803,2078 1822,2097 1822,2686.8 v2(2174.2,3039) ; v2(4019,1262) v2(4019,1608) ; v2(4405,2349) 4432,2322 v2(4432,1607)
  Signal_2 w10: v2(1811,1282) 1863,1230 3987,1230 v2(4019,1262) ; v2(4019,1608) 4431,1608 v2(4432,1607)
  Bottom Layer w10: Q1.6@1565,3142.07 Q1.5@1615,3142.07 1615,3218.43 1648.28,3251.72 2050.28,3251.72 2192,3110 2192,3056.8 v2(2174.2,3039)
HC3_ISENSE_ADC: R6.1 U2.51 U4.5 | length 5372.5
  Top Layer w10: U2.51@3181.89,3789.02 3181.89,3849.89 3297,3965 3373,3965 3417,4009 v2(3416,4009)
  Signal_1 w10: v2(978,2361) 1132,2207 1132,1995 1252,1875 v2(1255,1875) ; v2(2106,3097) 2106,3997 v2(2187,4078)
  Signal_2 w10: v2(978,2361) 978,2667 1408,3097 v2(2106,3097) ; v2(2187,4078) 2189,4080 2294,4080 2375.69,3998.31 2699.37,3998.31 2710.05,4009 v2(3416,4009)
  Bottom Layer w10: R6.1@871.59,2359 976,2359 v2(978,2361) ; v2(1255,1875) 1637.87,1875 1651.14,1861.73 U4.5@1651.14,1858.19
HC3_VSENSE_ADC: R29.1 R30.2 U2.55 | length 4923.9
  Top Layer w10: U2.55@3103.15,3789.02 3103.15,3968.15 v2(3225,4090)
  Signal_1 w10: v2(2398,1179) 2417,1198 2417,1939 2668,2190 2668,2738.57 2648,2758.57 2648,3153 v2(2640,3161) ; v2(3120,3056) 3096,3080 3096,3523.21 3103.15,3530.36 3103.15,3968.15 v2(3225,4090)
  Signal_2 w10: v2(2640,3161) 2738,3063 3113,3063 v2(3120,3056)
  Bottom Layer w10: R30.2@1654.52,1137.66 1727.27,1137.66 R29.1@1730.46,1140.85 2074.15,1140.85 2171,1044 2272,1044 2392,1164 2392,1173 v2(2398,1179)
HC4_ANALOG_BACKUP_REF: DAC1.6 IC1.4 | length 1817.4
  Top Layer w10: v2(1122,2760) 1156,2726 v2(1305,2726)
  Signal_1 w10: v2(1305,2726) 1305,2734 1766,3195 v2(1999,3195)
  Signal_2 w10: v2(1999,3195) 1999,3307 2191,3499 v2(2189,3501)
  Bottom Layer w10: IC1.4@1073.27,2865.8 1078.16,2860.91 1101.09,2860.91 1122,2840 v2(1122,2760) ; DAC1.6@1987.61,3501.4 1988.01,3501 v2(2189,3501)
HC4_EN: IC5.10 U2.19 | length 378.1
  Top Layer w10: v2(2808,3111) 2965.35,3268.35 U2.19@2965.35,3336.26
  Bottom Layer w10: v2(2808,3111) 2849.82,3152.82 2850.58,3152.82 2861,3163.24 IC5.10@2861,3176.28
HC4_GATE: IC6.12 Q1.7 Q1.8 T1.4 T2.4 | length 6610.5
  Top Layer w10: T1.4@2007.08,1319 2057.71,1369.63 2095.66,1369.63 2096.09,1369.2 2118.87,1369.2 2119.3,1369.63 2124.46,1369.63 2124.89,1369.2 2147.67,1369.2 2148.1,1369.63 2153.26,1369.63 2153.69,1369.2 2176.47,1369.2 2176.9,1369.63 2182.06,1369.63 2182.49,1369.2 2205.27,1369.2 2205.7,1369.63 2210.86,1369.63 2211.29,1369.2 2234.07,1369.2 2234.5,1369.63 2239.66,1369.63 2240.09,1369.2 2244.21,1369.2 2255.48,1357.94 T2.4@2255.48,1317.7 2262.4,1310.78 2278.4,1310.78 v2(2308.48,1280.7) ; v2(4363,2448) 4479.99,2448 IC6.12@4481.99,2446
  Signal_1 w10: v2(2221,3012) 2240,3012 2278,2974 2278,2815 2302.48,2790.52 2302.48,1700.27 2308.48,1694.27 v2(2308.48,1280.7) ; v2(3914.24,1641) 3932,1623.24 v2(3932,1274) ; v2(4363,2448) 4356,2441 4356,2380.43 4375,2361.43 4375,1666 v2(4400,1641)
  Signal_2 w10: v2(2308.48,1280.7) 2326.18,1263 3921,1263 v2(3932,1274) ; v2(3914.24,1641) v2(4400,1641)
  Bottom Layer w10: Q1.8@1465,3142.07 Q1.7@1515,3142.07 1515,3155.11 1521.29,3161.41 1529.69,3161.41 1648.28,3280 2076,3280 2221,3135 v2(2221,3012)
HC4_ISENSE_ADC: R3.1 U2.45 U3.5 | length 3599.2
  Top Layer w10: U2.45@3300,3651.22 3435.22,3651.22 v2(3625,3841)
  Signal_1 w10: v2(949,2710) 1039,2620 1039,2328.28 1152,2215.28 1152,2075 v2(1256,1971)
  Signal_2 w10: v2(949,2710) 1370,3131 v2(2070,3131)
  Bottom Layer w10: R3.1@869.72,2710.8 948.2,2710.8 v2(949,2710) ; v2(1256,1971) 1256.14,1971.14 1290.14,1971.14 1301,1982 2023.51,1982 2136.11,1869.39 2145.35,1869.39 2148.61,1866.13 U3.5@2148.61,1856.89
HC4_VSENSE_ADC: R26.1 R27.2 U2.56 | length 3934.3
  Top Layer w10: U2.56@3083.46,3789.02 3083.46,4024.46 3193.5,4134.5 v2(3195.11,4134.5)
  Signal_1 w10: v2(2331,1186) 2375,1230 2375,1808 2397,1830 2397,1947.28 2648,2198.28 2648,2730.29 2628,2750.29 2628,3130.57 2605,3153.57 2605,3207 2678,3280 2678,3436 3078,3836 3078,4017.39 v2(3195.11,4134.5)
  Bottom Layer w10: R27.2@2152,1136.36 2155.19,1139.55 R26.1@2227.93,1139.55 2284.55,1139.55 v2(2331,1186)
HC_1_OUTPUT: R35.2 T7.1 T7.2 T7.3 T8.1 T8.2 T8.3 X1.A2 X1.A11 | length 292.5
  Top Layer w10: 2267,2812.42 2314,2859.42 v2(2314,2878)
  Top Layer w60: X1.A11@622.44,3037.4 669.95,3084.91 709.32,3084.91 X1.A2@720.87,3096.46
  Bottom Layer w10: R35.2@2230.5,2880.55 2311.45,2880.55 v2(2314,2878)
HC_2_OUTPUT: R32.2 T5.1 T5.2 T5.3 T6.1 T6.2 T6.3 X1.A3 X1.A4 | length 94.5
  Bottom Layer w10: R32.2@1729.07,2880.55 1733,2880.55 1750.64,2862.91 1750.64,2858.98 1755.35,2854.27 v2(1755.35,2799.25)
HC_3_OUTPUT: R29.2 T3.1 T3.2 T3.3 T4.1 T4.2 T4.3 X1.B5 X1.B11 | length 187.3
  Top Layer w60: X1.B11@622.44,1285.43 669.95,1237.92 709.32,1237.92 X1.B5@720.87,1226.38
  Bottom Layer w10: R29.2@1730.46,1209.75 1730.14,1210.06 1730.14,1241.14 1752,1263 v2(1754,1263)
HC_4_OUTPUT: R26.2 T1.1 T1.2 T1.3 T2.1 T2.2 T2.3 X1.B6 X1.B12 | length 176.4
  Top Layer w60: X1.B12@622.44,1167.32 669.95,1119.81 709.32,1119.81 X1.B6@720.87,1108.27
  Bottom Layer w10: R26.2@2227.93,1208.45 v2(2227.93,1262)
JTAG_RST: C23.2 C24.2 D6.1 P1.10 R24.1 R65.1 U2.63 W1.2 | length 3458.3
  Top Layer w10: v2(2455,4046) 2500.04,4000.96 2500.04,3966.19 P1.10@2510,3956.23 ; v2(2831,4077) 2829,4077 2816,4064 2816,3977 2945.67,3847.33 U2.63@2945.67,3789.02 ; v2(3685,3930) 3685,3989.03 R24.1@3687.36,3991.39 3689.33,3991.39 3701.06,3979.66 3701.06,3977.69 3814.76,3864 v2(3880,3864) ; v2(3946,3410) 4000,3356 v2(4524,3356) ; C24.2@4445,3548 4453,3556 v2(4527,3556)
  Signal_2 w10: v2(2455,4046) 2498.95,4046 2520.63,4067.69 2819.69,4067.69 2829,4077 v2(2831,4077) 2912,4077 2950,4039 3599.45,4039 3685,3953.45 v2(3685,3930)
  Bottom Layer w10: v2(3880,3864) 3880,3794 3946,3728 v2(3946,3410) ; v2(4524,3356) 4524,3355 4527,3358 v2(4527,3556)
JTAG_TCLK: P1.4 U2.62 | length 687.5
  Top Layer w10: P1.4@2660,3956.23 2660,3881 v2(2686,3855) ; v2(2902,4044) 2965.35,3980.65 U2.62@2965.35,3789.02
  Bottom Layer w10: v2(2686,3855) 2713,3855 v2(2902,4044)
JTAG_TDI: P1.8 U2.61 | length 993.2
  Top Layer w10: v2(2505,3876) 2505.71,3876.71 2526.71,3876.71 2551.41,3901.41 2551.41,3947.63 P1.8@2560,3956.23 ; v2(2882,4115) 2985.04,4011.96 U2.61@2985.04,3789.02
  Bottom Layer w10: v2(2505,3876) 2505,3927 2697,4119 2866.14,4119 2866.32,4118.83 2878.17,4118.83 v2(2882,4115)
JTAG_TDO: P1.6 U2.58 | length 975.9
  Top Layer w10: P1.6@2610,3956.23 2610,3882 v2(2625,3867) ; v2(3037,4141) 3044.09,4133.91 U2.58@3044.09,3789.02
  Bottom Layer w10: v2(2625,3867) 2790,4032 2836,4032 2883,4079 2975,4079 v2(3037,4141)
JTAG_TMS: P1.2 R23.1 U2.64 | length 1465.1
  Top Layer w10: P1.2@2710,3956.23 2710,3970.37 2719.96,3980.33 2734.1,3980.33 2777,4023.23 v2(2777,4152) 2796,4133 2796,3956 2924.76,3827.24 U2.64@2924.76,3789.02 ; v2(3447,4158) 3522.72,4158 3556.77,4123.95 R23.1@3556.77,4121.98
  Bottom Layer w10: v2(2777,4152) 2781.43,4152 2800.43,4171 3409,4171 3422,4158 v2(3447,4158)
LC1_EN: IC8.3 U2.16 | length 1524.3
  Top Layer w10: v2(2627,3304) 2625,3306 2625,3323 2717,3415 U2.16@2847.24,3415 ; v2(3659.6,3221) 3714.6,3166 IC8.3@3813.99,3166
  Signal_2 w10: v2(2627,3304) 2654,3277 3545.28,3277 3601.28,3221 v2(3659.6,3221)
LC1_GATE: IC8.18 T16.4 | length 3652.6
  Top Layer w10: T16.4@2991.22,1231.47 3043.47,1231.47 3108,1296 v2(3108,1298) ; IC8.18@4188.01,3166 4189.01,3167 v2(4287,3167)
  Signal_1 w10: v2(3108,1298) 3108,1481 3452,1825 3452,2308.28 3665.72,2522 4452,2522 4701,2771 4701,3164 v2(4704,3167)
  Signal_2 w10: v2(4287,3167) v2(4704,3167)
LC2_EN: IC8.5 U2.15 | length 1699
  Top Layer w10: v2(2567,3284) 2566.64,3284.36 2566.64,3315.64 2685.68,3434.69 U2.15@2847.24,3434.69 ; v2(3660,3134) 3728,3066 IC8.5@3813.99,3066
  Signal_2 w10: v2(2567,3284) 2594,3257 3537,3257 v2(3660,3134)
LC2_GATE: IC8.16 T15.4 | length 3793.3
  Top Layer w10: T15.4@2623.8,1231.47 2668.47,1231.47 2737,1300 v2(2739,1300) ; IC8.16@4188.01,3066 4213.6,3066 4210.6,3063 v2(4650,3063)
  Signal_1 w10: v2(2739,1300) 2739,1425 2808.5,1494.5 3091.5,1494.5 3432,1835 3432,2316.57 3657.43,2542 4443,2542 4650,2749 v2(4650,3063)
LC3_EN: IC8.7 U2.14 | length 1922.3
  Top Layer w10: v2(2508,3268) 2509,3269 2509,3294 2669.37,3454.37 U2.14@2847.24,3454.37 ; v2(3598,3068) 3700,2966 IC8.7@3813.99,2966
  Signal_2 w10: v2(2508,3268) 2508,3265 2537,3236 3529.72,3236 3598,3167.72 v2(3598,3068)
LC3_GATE: IC8.14 T14.4 | length 3450.8
  Top Layer w10: T14.4@3726.06,1231.47 3770.47,1231.47 v2(3859,1320) ; IC8.14@4188.01,2966 v2(4858,2966)
  Signal_1 w10: v2(3859,1320) 3859,1774.11 3786.5,1846.61 3786.5,1854.5 3676,1965 3676,2372 3786,2482 4468.57,2482 4858,2871.43 v2(4858,2966)
LC4_EN: IC8.9 U2.13 | length 2054.2
  Top Layer w10: v2(2457.71,3251) 2459,3252.29 2459,3276 2657.06,3474.06 U2.13@2847.24,3474.06 ; v2(3559.28,3024) 3586,3024 3744,2866 IC8.9@3813.99,2866
  Signal_2 w10: v2(2457.71,3251) 2461.54,3247.17 2461.54,3237.46 2483,3216 3430.3,3216 3559.28,3087.02 v2(3559.28,3024)
LC4_GATE: IC8.12 T13.4 | length 3300.8
  Top Layer w10: T13.4@3358.64,1231.47 3398.47,1231.47 3471,1304 v2(3472,1303) ; IC8.12@4188.01,2866 4191.01,2863 v2(4781,2863)
  Signal_1 w10: v2(3472,1303) 3472,2300 3674,2502 4460.28,2502 4781,2822.72 v2(4781,2863)
LC5_EN: IC7.3 U2.12 | length 2580.5
  Top Layer w10: v2(2447,3329) 2611.74,3493.74 U2.12@2847.24,3493.74
  Signal_2 w10: v2(2447,3329) 2450.83,3332.83 2461.68,3332.83 2462.86,3334 3590.57,3334 3709.29,3452.71 3773.87,3452.71 3782.59,3444 v2(3787,3444)
  Bottom Layer w10: v2(3787,3444) 3787,3052 3984,2855 IC7.3@4030.56,2855
LC5_GATE: IC7.18 T12.4 | length 2982.2
  Top Layer w10: v2(2308,2926) 2326,2908 2326.43,2908 2360.27,2874.16 T12.4@2360.27,2813
  Signal_1 w10: v2(3281,3024) 3303,3046 3384.57,3046 3406.57,3024 3493,3024 3653,2864 3653,2781 3792,2642 v2(3872,2642)
  Signal_2 w10: v2(2308,2926) 2374,2992 3249,2992 v2(3281,3024) ; v2(3872,2642) 4470,2642 v2(4603,2775)
  Bottom Layer w10: IC7.18@4404.58,2855 4523,2855 v2(4603,2775)
LC6_EN: IC7.5 U2.11 | length 2351.8
  Top Layer w10: v2(2503,3453) 2505,3453 2565.43,3513.43 U2.11@2847.24,3513.43
  Signal_2 w10: v2(2503,3453) 2543,3493 3819,3493 v2(3847,3465)
  Bottom Layer w10: v2(3847,3465) 3847,3097 3984.57,2959.43 4026.13,2959.43 IC7.5@4030.56,2955
LC6_GATE: IC7.16 T11.4 | length 1716.1
  Top Layer w10: v2(3042,2884) 3086.33,2839.67 3086.33,2821.2 T11.4@3095.11,2812.42
  Signal_2 w10: v2(3042,2884) 3101,2943 4493,2943 v2(4512,2924)
  Bottom Layer w10: IC7.16@4404.58,2955 4481,2955 v2(4512,2924)
LC7_EN: IC7.7 U2.2 | length 2416.9
  Top Layer w10: v2(2610,3827) 2604,3821 2604,3784 2697.41,3690.59 U2.2@2847.24,3690.59
  Signal_2 w10: v2(2610,3827) 2610,3781 2650,3741 v2(3817,3741)
  Bottom Layer w10: v2(3817,3741) 3850,3741 3888,3703 3888,3153 3984.02,3056.98 4028.59,3056.98 IC7.7@4030.56,3055
LC7_GATE: IC7.14 T10.4 | length 2060.7
  Top Layer w10: v2(2683,2879) 2686.83,2875.17 2686.83,2862.25 2727.69,2821.39 T10.4@2727.69,2812.53
  Signal_2 w10: v2(2683,2879) 2726.95,2922.95 2726.95,2931.88 2767.08,2972 4458,2972 4492,3006 v2(4492,3008)
  Bottom Layer w10: IC7.14@4404.58,3055 4409.58,3050 4450,3050 v2(4492,3008)
LC8_EN: IC7.9 U2.1 | length 2142.8
  Top Layer w10: v2(2671,3796) 2671,3763 2724,3710 2724.28,3710.28 U2.1@2847.24,3710.28
  Signal_2 w10: v2(2671,3796) v2(3768,3796)
  Bottom Layer w10: v2(3768,3796) 3843,3796 3914,3725 3914,3236 3995,3155 IC7.9@4030.56,3155
LC8_GATE: IC7.12 T9.4 | length 1643
  Top Layer w10: v2(3421,2876.64) 3466.36,2831.27 3473.3,2831.27 3482.08,2822.49 T9.4@3482.08,2813.64
  Signal_1 w10: v2(4563,3108) 4563,3102.59 4571,3094.59 v2(4571,2901)
  Signal_2 w10: v2(3421,2876.64) 4550.64,2876.64 4571,2897 v2(4571,2901)
  Bottom Layer w10: IC7.12@4404.58,3155 4516,3155 v2(4563,3108)
LC_1_ISENSE_ADC: IC16.5 U2.49 | length 364.6
  Top Layer w10: U2.49@3221.26,3789.02 3221.26,3808.26 3297,3884 3449,3884 v2(3510,3945)
LC_1_OUTPUT: R59.2 T16.1 T16.2 T16.3 X1.B13 | length 2793.5
  Top Layer w10: T16.3@2941.22,1231.47 2944.67,1234.92 2944.67,1263.25 2958.42,1277 3013.27,1277 v2(3057.42,1321.15)
  Top Layer w47.24: X1.B13@622.44,1049.21 622.44,961.62 670.83,913.23 2398.03,913.23 2630.8,1146 2897,1146 2922,1171
  Bottom Layer w10: v2(3057.42,1321.15) 3109.04,1372.77 3109.04,1392.97 R59.2@3120.62,1404.55
LC_1_VSENSE_ADC: R59.1 R60.2 U2.25 | length 1719.3
  Top Layer w10: U2.25@3083.46,3336.26 3083.46,3201.54 3161,3124 3161,3075 3160,3074 v2(3160,3069)
  Signal_1 w10: v2(3050,2695) 3049,2695 3049,2573 3184,2438 3184,1756.57 3132.43,1705 3120,1705 v2(3081,1666)
  Bottom Layer w10: R60.2@3047.24,1476.64 3050.42,1473.45 R59.1@3120.62,1473.45 3120.62,1626.38 v2(3081,1666)